# EAGLE board Automaton_no_switches (EAGLE 6.1)

Size 100 x 80 mm. Coordinates in mm from the lower left corner, seen from the top.
Outline: 0,0 100,0 100,80 0,80 0,0
Copper layers (1*16): Top 0.035mm / dielectric 1.5mm / Bottom 0.035mm
Design rules: minimum track width 10mil, minimum drill 24mil, track to track 8mil, track to pad 8mil, pad to pad 8mil, via to via 8mil, smd to smd 8mil, copper to edge 40mil, drill to drill 8mil, minimum pad ring 10mil, minimum via ring 8mil, stop-mask expansion 4mil, vias tented up to drill 0mil, thermal gap 10mil

## Footprints (pad centres in the part's own frame; a part is rotated, then mirrored left to right if it is on the bottom)
C025-024X044 = drill 0.813 octagon: 1 -1.27,0; 2 1.27,0
1210 = smd 1.2 x 2: 1 -1.6,0; 2 1.6,0
SO16 = smd 0.66 x 2.032: 1 -4.445,-3.073; 2 -3.175,-3.073; 3 -1.905,-3.073; 4 -0.635,-3.073; 5 0.635,-3.073; 6 1.905,-3.073; 7 3.175,-3.073; 8 4.445,-3.073; 9 4.445,3.073; 10 3.175,3.073; 11 1.905,3.073; 12 0.635,3.073; 13 -0.635,3.073; 14 -1.905,3.073; 15 -3.175,3.073; 16 -4.445,3.073
POWER_JACK_PTH = drill 2.997 pad 4.318: GND 0,7.7; GNDBREAK 4.7,10.7; PWR 0,13.7
SMARTLED-TTW = smd 0.8 x 0.5: A 0,-0.875; C 0,0.875 | smd 0.35 x 0.35: A@1 0,-0.5; C@1 0,0.5
0204/5 = drill 0.813 octagon: 1 -2.54,0; 2 2.54,0
8S2 = smd 0.5 x 1.4: 1 -1.905,-3.404; 2 -0.645,-3.404; 3 0.625,-3.404; 4 1.895,-3.404; 5 1.905,3.404; 6 0.635,3.404; 7 -0.635,3.404; 8 -1.905,3.404
TO220H = drill 1.118 long: 1 -2.54,-10.16; 2 0,-10.16; 3 2.54,-10.16 | hole 3.302: 0,4.826
2X5-SHROUDED_LOCK = drill 1.016 pad 1.88 octagon: 1 -1.397,5.08; 2 1.397,5.08; 3 -1.397,2.54; 4 1.397,2.54; 5 -1.397,0; 6 1.397,0; 7 -1.397,-2.54; 8 1.397,-2.54; 9 -1.397,-5.08; 10 1.397,-5.08

## Placement (x,y rotation side)
C1  0.1uf  [C025-024X044]  74.93,27.94 0 top
C4  10uf  [1210]  39.37,17.78 0 top
C5  100uf  [1210]  45.72,25.4 0 top
IC1  74LS595D  [SO16]  15.24,55.88 180 top
IC2  74LS595D  [SO16]  88.9,54.61 180 top
IC3  74LS595D  [SO16]  62.23,53.34 180 top
IC4  74LS595D  [SO16]  39.37,53.34 180 top
J1  POWER_JACKPTH  [POWER_JACK_PTH]  77.47,-1.27 0 top
LED25  [SMARTLED-TTW]  64.77,22.86 0 top
R2  330  [0204/5]  66.04,33.02 0 top
U$1  TINY13-20SU  [8S2]  50.8,35.56 90 top
U$2  LM323  [TO220H]  92.71,13.97 0 top
U$3  AVR_SPI_PROG2LOCK  [2X5-SHROUDED_LOCK]  62.23,72.39 270 top
U$4  AVR_SPI_PROG2LOCK  [2X5-SHROUDED_LOCK]  86.36,72.39 270 top
U$5  AVR_SPI_PROG2LOCK  [2X5-SHROUDED_LOCK]  38.1,72.39 270 top
U$6  AVR_SPI_PROG2LOCK  [2X5-SHROUDED_LOCK]  12.7,72.39 270 top

## Library data of the parts
C1 R2 = resistor
C4 C5 J1 U$3-U$6 = SparkFun
IC1-IC4 = 74xx-us
LED25 = led
U$1 = MyAtmel; MPN: ATTINY13-20SU; OC_FARNELL: 9171568; OC_NEWARK: 96K6522
U$2 = MyLib

## Nets
5V: C1.1 C5.2 LED25.A@1 U$1.1 U$1.8 U$2.3 U$3.9 U$4.9 U$5.9 U$6.9
GND: C1.2 IC1.8 IC1.10 IC2.8 IC2.10 IC3.8 IC3.10 IC4.8 IC4.10 R2.2 U$1.4 U$3.10 U$4.10 U$5.10 U$6.10
LED_1: IC3.15 U$3.1
LED_2: IC3.1 U$3.2
LED_3: IC3.2 U$3.3
LED_4: IC3.3 U$3.4
LED_5: IC3.4 U$3.5
LED_6: IC3.5 U$3.6
LED_7: IC3.6 U$3.7
LED_8: IC3.7 U$3.8
LED_9: IC2.15 U$4.1
LED_10: IC2.1 U$4.2
LED_11: IC2.2 U$4.3
LED_12: IC2.3 U$4.4
LED_13: IC2.4 U$4.5
LED_14: IC2.5 U$4.6
LED_15: IC2.6 U$4.7
LED_16: IC2.7 U$4.8
LED_17: IC4.15 U$5.1
LED_18: IC4.1 U$5.2
LED_19: IC4.2 U$5.3
LED_20: IC4.3 U$5.4
LED_21: IC4.4 U$5.5
LED_22: IC4.5 U$5.6
LED_23: IC4.6 U$5.7
LED_24: IC4.7 U$5.8
LED_25: IC1.15 U$6.1
LED_26: IC1.1 U$6.2
LED_27: IC1.2 U$6.3
LED_28: IC1.3 U$6.4
LED_29: IC1.4 U$6.5
LED_30: IC1.5 U$6.6
LED_31: IC1.6 U$6.7
LED_32: IC1.7 U$6.8
LED_RCLK: IC3.12
LEDS_IC2_SER: IC1.9 IC4.14
LEDS_IC3_SER: IC2.14 IC4.9
LEDS_IC4_SER: IC2.9 IC3.14
LEDS_RCLK: IC1.12 IC2.12 IC4.12 U$1.5
LEDS_SER: IC1.14 U$1.6
LEDS_SRCLK: IC1.11 IC2.11 IC3.11 IC4.11 U$1.7
N$1: C4.2 J1.PWR U$2.1
N$4: C4.1 C5.1 U$2.2
N$27: LED25.C@1 R2.1
VCC: IC1.16 IC2.16 IC3.16 IC4.16

## Tracks (layer width: path | path; a pad name or v marks a point on that pad's centre or on a via)
5V  (9 unrouted)
GND  (14 unrouted)
LED_1  (1 unrouted)
LED_2  (1 unrouted)
LED_3  (1 unrouted)
LED_4  (1 unrouted)
LED_5  (1 unrouted)
LED_6  (1 unrouted)
LED_7  (1 unrouted)
LED_8  (1 unrouted)
LED_9  (1 unrouted)
LED_10  (1 unrouted)
LED_11  (1 unrouted)
LED_12  (1 unrouted)
LED_13  (1 unrouted)
LED_14  (1 unrouted)
LED_15  (1 unrouted)
LED_16  (1 unrouted)
LED_17  (1 unrouted)
LED_18  (1 unrouted)
LED_19  (1 unrouted)
LED_20  (1 unrouted)
LED_21  (1 unrouted)
LED_22  (1 unrouted)
LED_23  (1 unrouted)
LED_24  (1 unrouted)
LED_25  (1 unrouted)
LED_26  (1 unrouted)
LED_27  (1 unrouted)
LED_28  (1 unrouted)
LED_29  (1 unrouted)
LED_30  (1 unrouted)
LED_31  (1 unrouted)
LED_32  (1 unrouted)
LEDS_IC2_SER  (1 unrouted)
LEDS_IC3_SER  (1 unrouted)
LEDS_IC4_SER  (1 unrouted)
LEDS_RCLK  (3 unrouted)
LEDS_SER  (1 unrouted)
LEDS_SRCLK  (4 unrouted)
N$1  (2 unrouted)
N$4  (2 unrouted)
N$27  (1 unrouted)
VCC  (3 unrouted)